# Altium PCB 按键去抖.pcbdoc
Units mil, origin at the board's own origin, x right, y up, seen from the top; angles counter-clockwise.
Board outline 3653 x 2540 mil, 2 copper layers (Top Layer, Bottom Layer); 17 components, 25 nets, 44 pads, 0 vias.
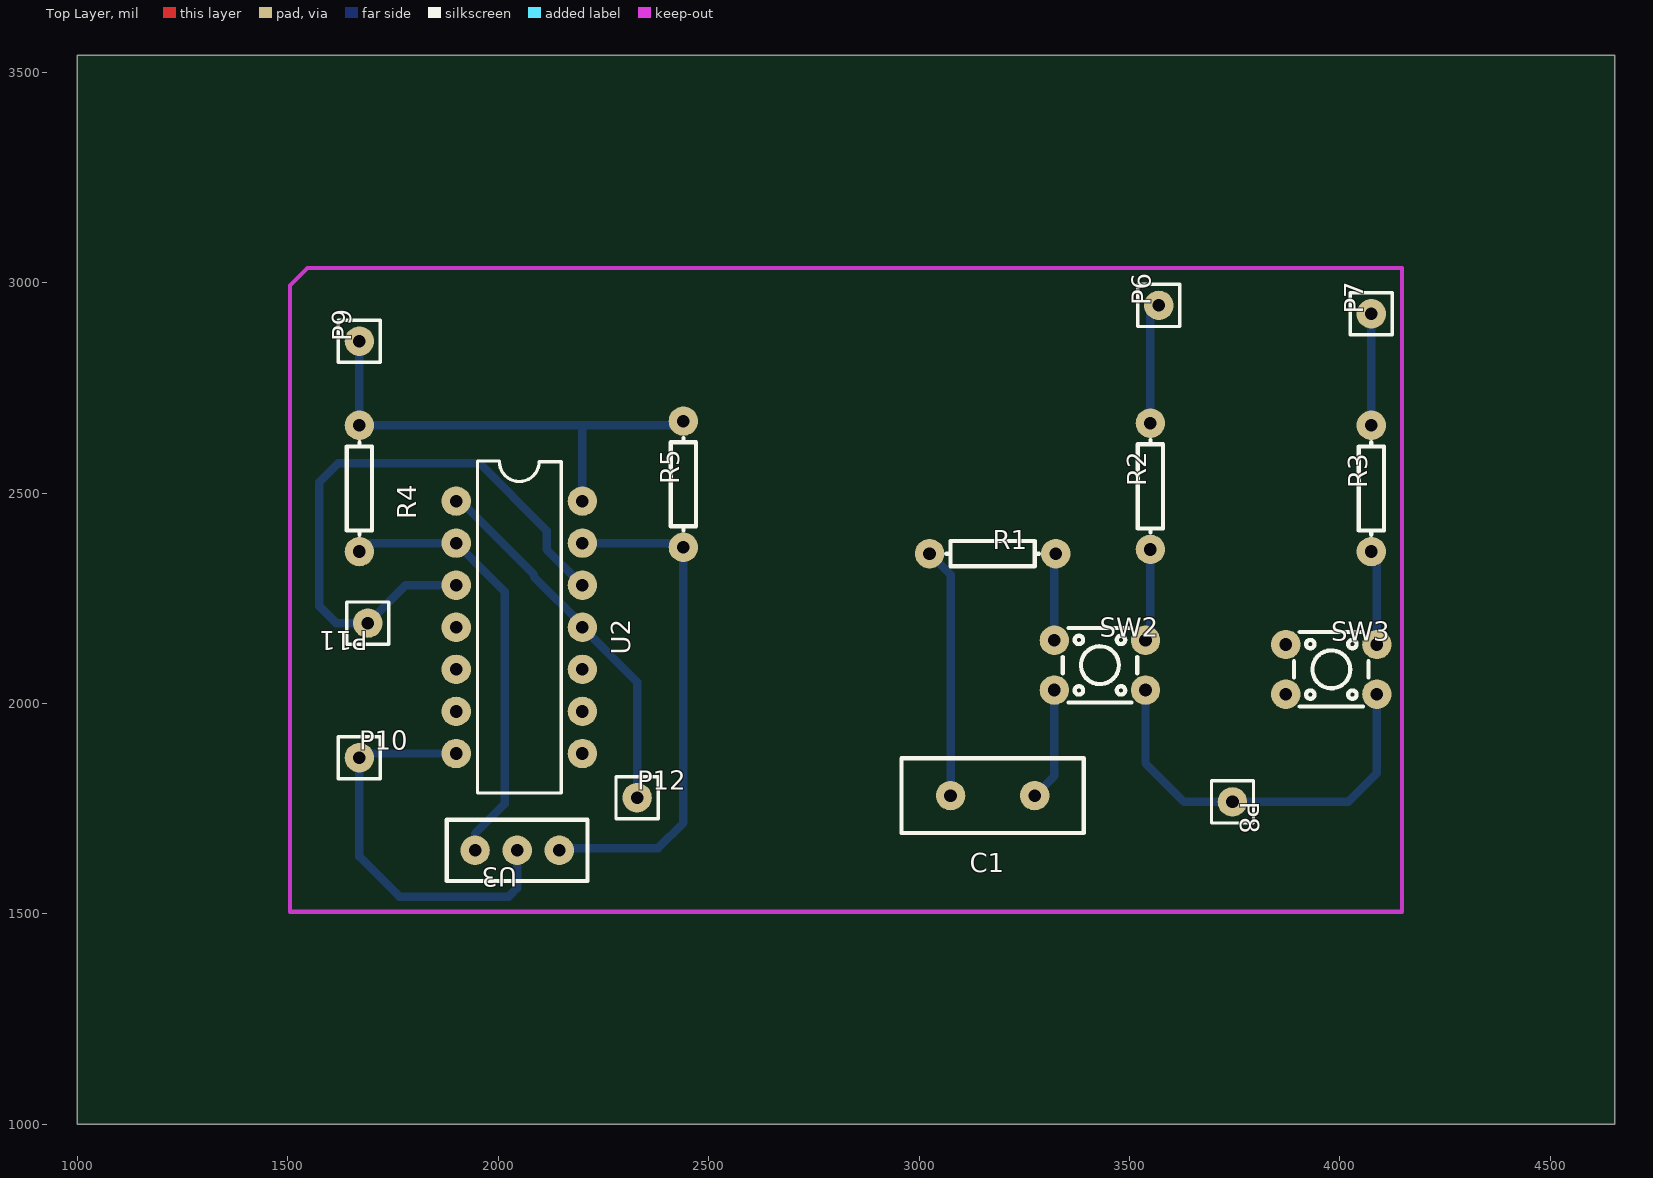
[diagram p0: Top Layer view]
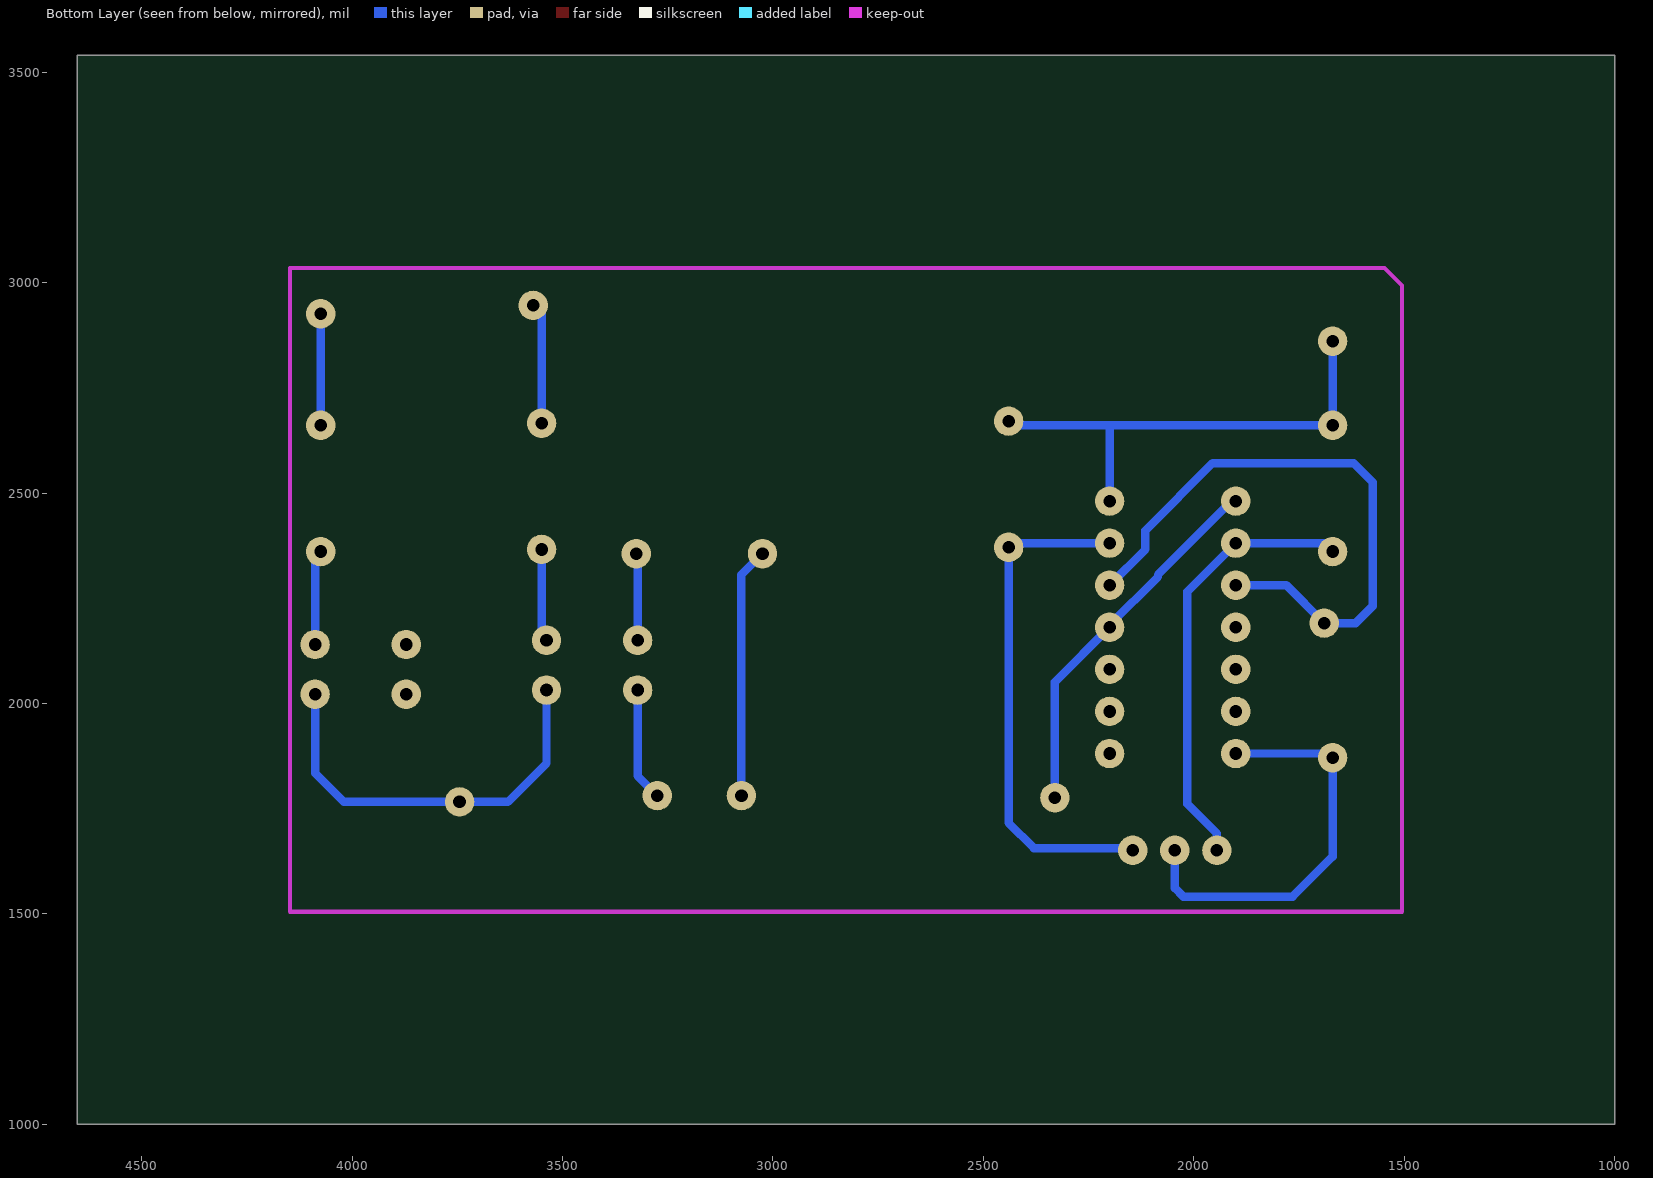
[diagram p1: Bottom Layer view, seen from below]

## Layer stack, top to bottom
Top Layer: signal copper (thickness not stored)
Dielectric: dielectric 12.6, FR-4, Dk 4.8
Bottom Layer: signal copper (thickness not stored)

## Board outline
4653,1000 1000,1000 1000,3540 4653,3540

## Components (designator, comment, footprint, x,y, rotation, side; value= is the part's Value field where it differs from the comment)
C1 "105" CAP-TH_L11.0-W4.5-P5.08-D1.2 3175,1781 r180 top
P6 "Header-Male-2.54_1x1" HDR-1X1/2.54 3570,2946 r90 top
P7 "Header-Male-2.54_1x1" HDR-1X1/2.54 4075,2926 r90 top
P8 "Header-Male-2.54_1x1" HDR-1X1/2.54 3745,1766 r270 top
P9 "Header-Male-2.54_1x1" HDR-1X1/2.54 1670,2861 r90 top
P10 "Header-Male-2.54_1x1" HDR-1X1/2.54 1670,1871 r0 top
P11 "Header-Male-2.54_1x1" HDR-1X1/2.54 1690,2191 r180 top
P12 "Header-Male-2.54_1x1" HDR-1X1/2.54 2330,1776 r0 top
R1 "15k" AXIAL-0.3 3175,2356 r0 top
R2 "1k" AXIAL-0.3 3550,2516 r90 top
R3 "1k" AXIAL-0.3 4075,2511 r90 top
R4 "1k" AXIAL-0.3 1670,2511 r270 top
R5 "1k" AXIAL-0.3 2440,2521 r90 top
SW2 "TS-1009-04526" KEY-TH_4P-L4.5-W4.5-P3.00-LS5.8 3430,2091 r0 top
SW3 "TS-1009-04526" KEY-TH_4P-L4.5-W4.5-P3.00-LS5.8 3980,2081 r0 top
U2 "SN74HC00N" DIP-14_L20.0-W7.6-P2.54-LS7.6-BL 2050,2181 r270 top
U3 "SS12D00" SWITCH_2.54 2045,1651 r180 top

## Footprints (in the part's own frame and the unit in brackets; to place one, negate y for a bottom-side part, rotate by r counter-clockwise, add the part's x,y. Pads: shape width x height; smd on the part's side, far side on the other; paste and mask are expansions set on the pad)
AXIAL-0.3 [mil]
  round 70 hole 30: 1(-150,0) 2(150,0)
  silkscreen extent -110,-30 110,30
CAP-TH_L11.0-W4.5-P5.08-D1.2 [mil]
  round 70 hole 30: 1(-100,0) 2(100,0)
  silkscreen extent -217,-89 217,89
DIP-14_L20.0-W7.6-P2.54-LS7.6-BL [mil]
  round 70 hole 30: 1(-300,-150) 2(-200,-150) 3(-100,-150) 4(0,-150) 5(100,-150) 6(200,-150) 7(300,-150) 8(300,150) 9(200,150) 10(100,150) 11(0,150) 12(-100,150) 13(-200,150) 14(-300,150)
  silkscreen extent -395,-99 394,100
HDR-1X1/2.54 [mil]
  round 70 hole 30: 1(0,0)
  silkscreen extent -50,-50 50,50
KEY-TH_4P-L4.5-W4.5-P3.00-LS5.8 [mil]
  round 70 hole 30: 1(-108.3,59.1) 2(108.3,59.1) 3(-108.3,-59.1) 4(108.3,-59.1)
  silkscreen extent -89,-89 89,89
SWITCH_2.54 [mil]
  round 70 hole 30: 1(-100,0) 2(0,0) 3(100,0)
  silkscreen extent -167,-73 167,73

## Nets (pads, with @x,y where several pads share a name; then routed paths per layer and width w, separated by ;. In a path a pad name is that pad's centre, name@x,y a point inside that pad or via, vN(x,y) a via of type N, cw(c..) or ccw(c..) an arc to the next point about the centre after c; other vN are vias at no path point)
C1_2: C1.2 R1.1 | length 595.7
  Bottom Layer w20: R1.1 3075,2306 C1.2
GND: P10.1 U2.7 U3.2 | length 981.8
  Bottom Layer w20: U2.7 1680,1881 P10.1 1670,1636 1765,1541 2025,1541 2045,1561 U3.2
P6_1: P6.1 R2.2 | length 288.3
  Bottom Layer w20: R2.2 3550,2926 P6.1
P7_1: P7.1 R3.2 | length 265
  Bottom Layer w20: R3.2 P7.1
S$11: 
S$13: 
S$48: 
SW2_1: R1.2 SW2.1 | length 207.3
  Bottom Layer w20: SW2.1 3321.7,2352.7 R1.2
SW2_2: R2.1 SW2.2 | length 220.7
  Bottom Layer w20: SW2.2 3550,2161.8 R2.1
SW2_3: C1.1 SW2.3 | length 270.2
  Bottom Layer w20: C1.1 3321.7,1827.7 SW2.3
SW2_4: P8.1 SW2.4 SW3.4 | length 978.1
  Bottom Layer w20: SW2.4 3538.3,1857.7 3630,1766 P8.1 4020,1766 4088.3,1834.3 SW3.4
SW3_1: SW3.1
SW3_2: R3.1 SW3.2 | length 226.4
  Bottom Layer w20: R3.1 4088.3,2347.7 SW3.2
SW3_3: SW3.3
U2_1: P12.1 U2.1 U2.11 | length 889
  Bottom Layer w20: U2.1 1905,2476 1915,2476 2085,2306 2085,2301 2200,2186 U2.11 2330,2051 P12.1
U2_2: R4.2 U2.2 U3.3 | length 1044.9
  Bottom Layer w20: R4.2 1690,2381 U2.2 2015,2266 2015,1761 1945,1691 U3.3
U2_3: P11.1 U2.3 U2.12 | length 1464
  Bottom Layer w20: U2.3 1780,2281 P11.1 1615,2191 1575,2231 1575,2526 1620,2571 1955,2571 2115,2411 2115,2366 U2.12
U2_4: U2.4
U2_5: U2.5
U2_6: U2.6
U2_8: U2.8
U2_9: U2.9
U2_10: U2.10
U2_13: R5.1 U2.13 U3.1 | length 1221.1
  Bottom Layer w20: U3.1 2150,1656 2380,1656 2440,1716 R5.1 2430,2381 U2.13
U2_14: P9.1 R4.1 R5.2 U2.14 | length 1154.1
  Bottom Layer w20: P9.1 R4.1 2200,2661 ; U2.14 2200,2661 ; R5.2 2430,2661 2200,2661

## Silkscreen, mask and mechanical layers (free items; w line width, h text height)
Document:
  lines w0.1: 2825.5,2269 2827.5,2271